# Altium PCB 如意硬件GPRS模块0831.PcbDoc
Units mm, origin at the board's own origin, x right, y up, seen from the top; angles counter-clockwise.
Board outline 55 x 49 mm, 2 copper layers (Top Layer, Bottom Layer); 54 components, 42 nets, 200 pads, 36 vias.
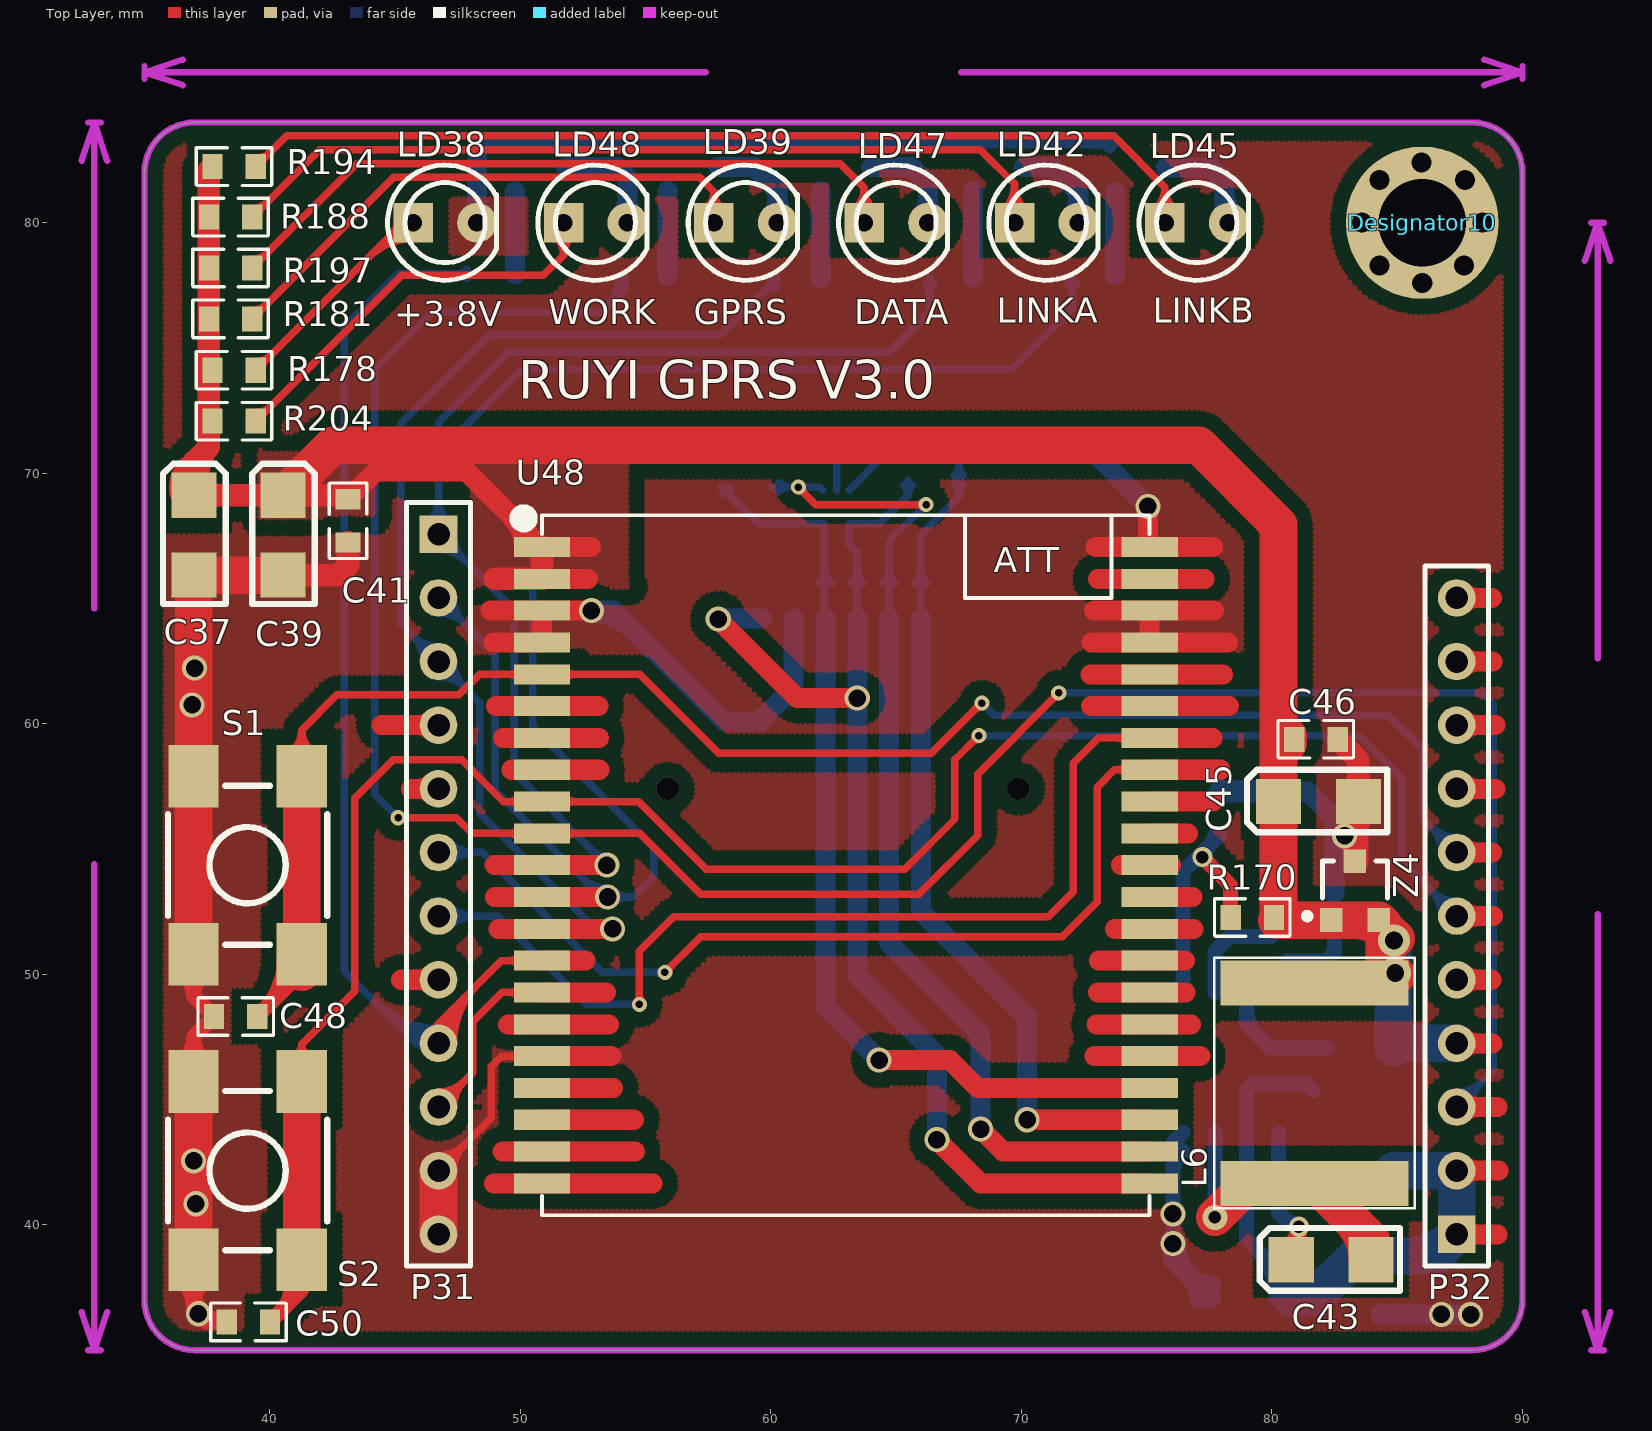
[diagram p0: Top Layer view]
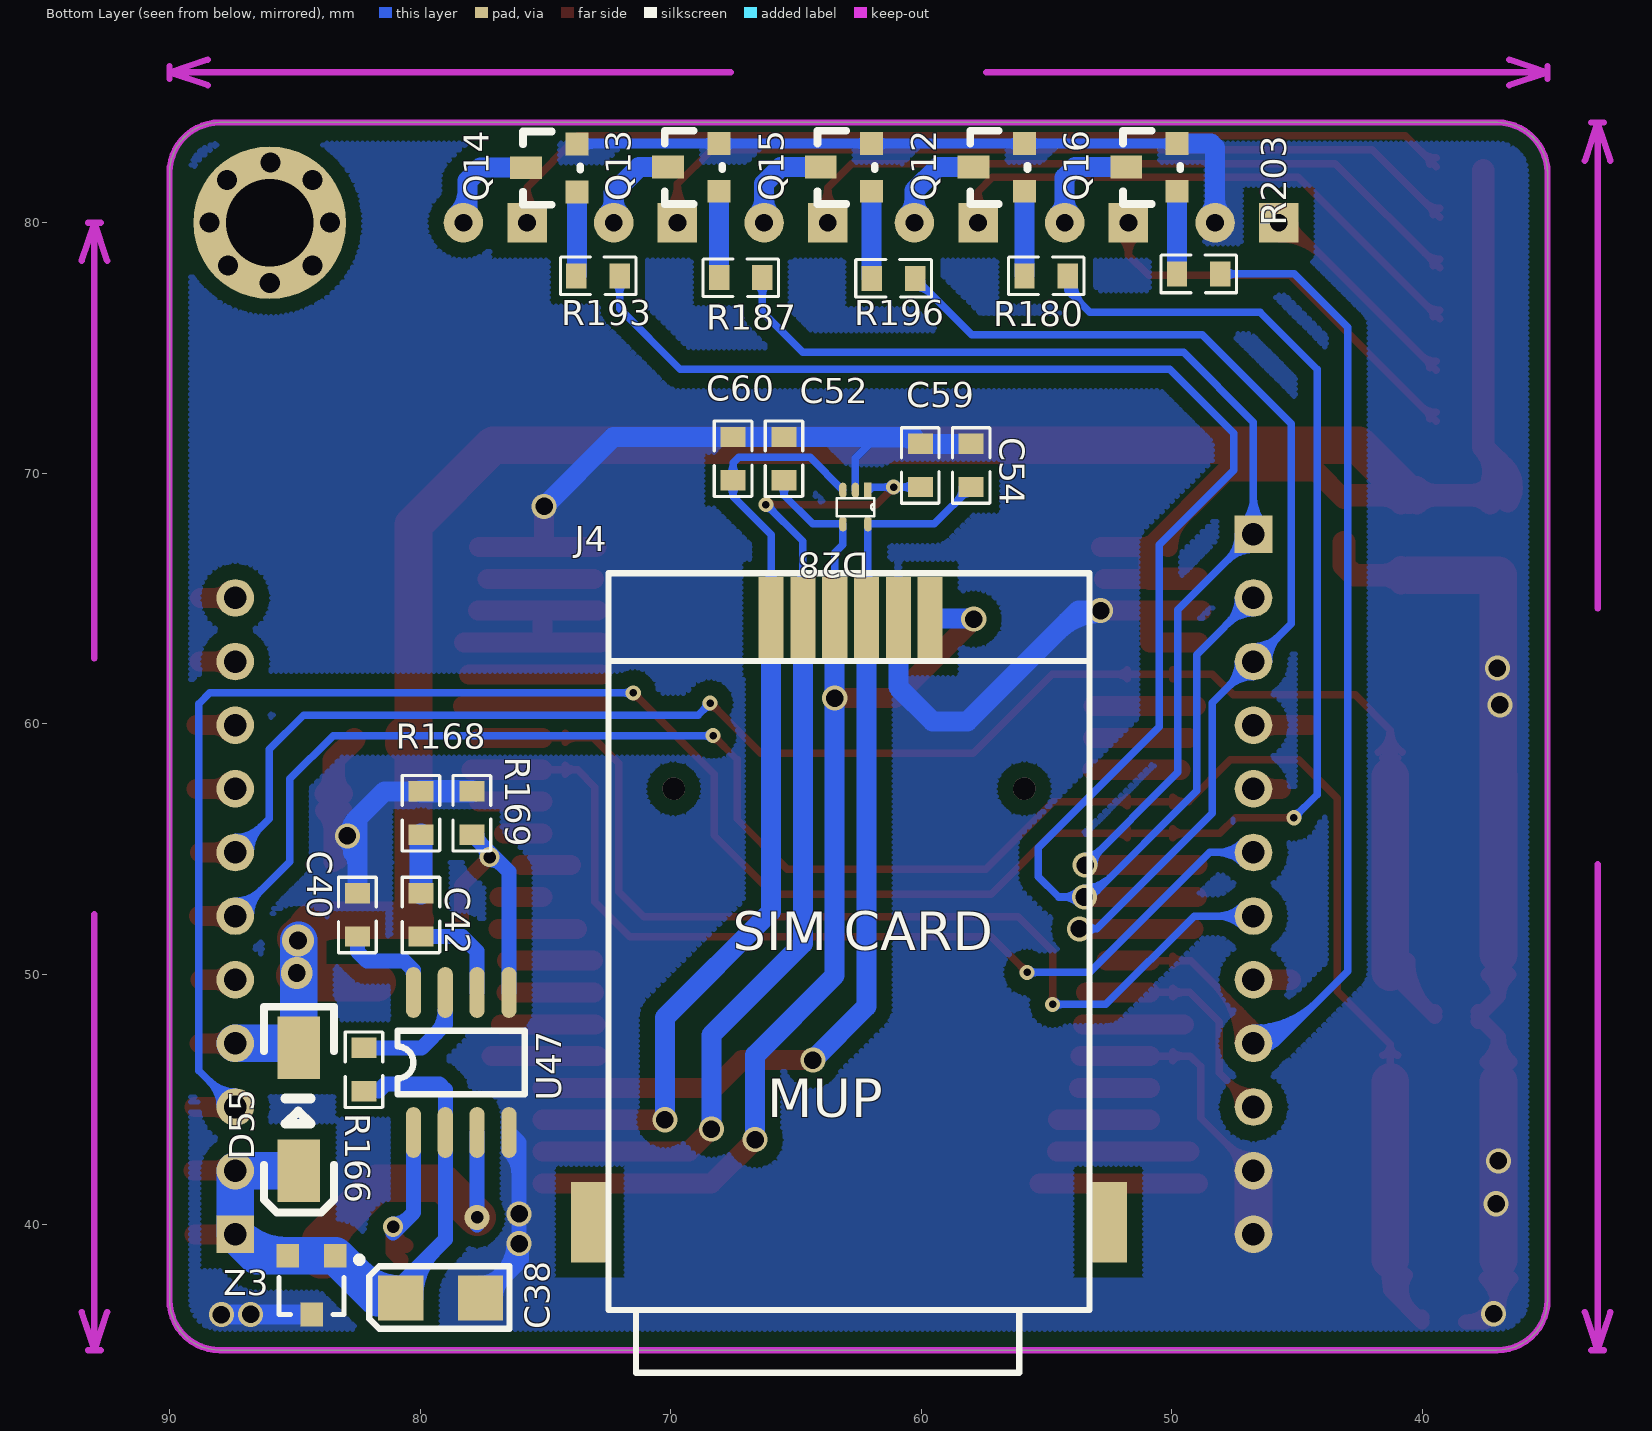
[diagram p1: Bottom Layer view, seen from below]

## Layer stack, top to bottom
Top Layer: signal copper 0.0356
Dielectric: dielectric 0.32, FR-4, Dk 4.8
Bottom Layer: signal copper 0.0356

## Board outline
37,35 cw(c37,37) 35,37 35,82 cw(c37,82) 37,84 88,84 cw(c88,82) 90,82 90,37 cw(c88,37) 88,35

## Design rules (kind name [scope] priority, off if disabled: settings)
Clearance Clearance_1 [InPolygon] p1: gap=0.6
Clearance [All] p2: gap=0.254
ComponentClearance [All] p1: gap=0 collisioncheckmode=3 verticalgap=0 showdistances=FALSE
FabricationTestpoint [(IsPad And (OnTopLayer Or OnBottomLayer))] p1: side=3 testpointundercomponent=TRUE minsize=1.016 maxsize=2.54 preferedsize=1.524 minholesize=0 maxholesize=1.016 preferedholesize=0.813 testpointgrid=0.025 allowsidetop=TRUE allowsidebottom=TRUE usegrid=TRUE gridtolerance=0
HoleToHoleClearance [All] p1: gap=0.2 allowstackedmicrovias=TRUE
MinimumSolderMaskSliver [All] p1: minsoldermaskwidth=0.2
PolygonConnect PolygonConnect_1 [IsVia Or IsSMTPin Or IsThruPin vs IsPoly] p1: connectstyle=Direct reliefconductorwidth=0.254 reliefentries=4 polygonreliefangle="90 Angle"
PolygonConnect [All] p2: connectstyle=Relief reliefconductorwidth=0.254 reliefentries=4 polygonreliefangle="90 Angle"
RoutingVias [All] p1: holewidth=0.711 width=1.27 viastyle="Through Hole" minholewidth=0.3 minwidth=0.6 maxholewidth=0.711 maxwidth=1.27
SilkToSilkClearance [All] p1: silktosilkclearance=0
SilkscreenOverComponentPads [All] p1: minsilkscreentomaskgap=0
SolderMaskExpansion [All] p1: expansion=0.102
Width [All] p1: maxlimit=1.5 minlimit=0.3 preferedwidth=0.8
22 further rules are at their usual default settings.

## Components (designator, comment, footprint, x,y, rotation, side; value= is the part's Value field where it differs from the comment)
C37 "200uf/16V" 1206D-S 36.973,69.121 r0 top
C38 "Cap Pol1" 1206D-S 80.772,37.084 r90 bottom
C39 "47uf/6.3V" 1206D-S 40.529,69.121 r0 top
C40 "0.1uf/50v" 0603C-1 82.56,52.403 r90 bottom
C41 "0.1uf" 0603C-1 43.18,68.072 r270 top
C42 "3.3nf/50v" 0603C-1 80.02,52.403 r90 bottom
C43 "10nf/50v" 1206D-S 80.772,38.608 r90 top
C45 "Cap Pol1" 1206D-S 80.264,56.896 r90 top
C46 "0.1uf/50v" 0603C-1 81.788,59.436 r0 top
C48 "0.1uf" 0603C-1 38.608,48.26 r180 top
C50 "0.1uf" 0603C-1 39.116,36.068 r180 top
C52 "0.1uf" 0603C-1 65.532,70.612 r90 bottom
C54 "47pf" 0603C-1 58.059,70.341 r90 bottom
C59 "47pf" 0603C-1 60.091,70.341 r90 bottom
C60 "47pf" 0603C-1 67.564,70.612 r90 bottom
D28 "ESDA6V8AV5" SOT-553 62.123,69.325 r270 bottom
D55 "IN4007" DIODETP-5 84.836,42.164 r270 bottom
Designator10 "Comment" Hole-3MM 86,80 r0 top
J4 "SIMC749" SIMPUSH 55.88,57.404 r180 bottom
L6 "10uH" NR8030 81.705,41.656 r90 top
LD38 "LED" LED_Z1 47,80 r180 top
LD39 "LED" LED_Z1 59,80 r180 top
LD42 "LED" LED_Z1 71,80 r180 top
LD45 "LED" LED_Z1 77,80 r180 top
LD47 "LED" LED_Z1 65,80 r180 top
LD48 "LED" LED_Z1 53,80 r180 top
P31 "Header 12" HDR1X12 46.736,67.564 r270 top
P32 "Header 11" HDR1X11 87.376,39.624 r90 top
Q12 "9013" SOT23-BCE 55.88,81.255 r90 bottom
Q13 "9013" SOT23-BCE 68.072,81.255 r90 bottom
Q14 "9013" SOT23-BCE 73.735,81.23 r90 bottom
Q15 "9013" SOT23-BCE 61.976,81.255 r90 bottom
Q16 "9013" SOT23-BCE 49.784,81.255 r90 bottom
R166 "100K" 0603R-1 82.296,46.228 r90 bottom
R168 "2.2K" 0603R-1 80.02,56.467 r90 bottom
R169 "10K" 0603R-1 77.988,56.467 r90 bottom
R170 "31.2K" 0603R-1 79.248,52.324 r0 top
R178 "1K" 0603R-1 38.608,74.168 r0 top
R180 "1K" 0603R-1 55.039,77.824 r0 bottom
R181 "1K" 0603R-1 38.465,76.218 r0 top
R187 "1K" 0603R-1 67.231,77.749 r0 bottom
R188 "1K" 0603R-1 38.465,80.282 r0 top
R193 "1K" 0603R-1 72.927,77.824 r0 bottom
R194 "1K" 0603R-1 38.608,82.296 r0 top
R196 "1K" 0603R-1 61.135,77.724 r0 bottom
R197 "1K" 0603R-1 38.465,78.25 r0 top
R203 "1K" 0603R-1 48.951,77.9 r0 bottom
R204 "1K" 0603R-1 38.608,72.136 r0 top
S1 "SW-PB" SW_PB4_A1 39.116,54.356 r90 top
S2 "SW-PB" SW_PB4_A1 39.116,42.164 r90 top
U47 "MP1482" SO-8 80.264,43.688 r90 bottom
U48 "USR-GM3" USR-GM3 62.992,54.356 r0 top
Z3 "NUP2105L" SOT-23 84.328,37.592 r0 bottom
Z4 "NUP2105L" SOT-23 83.312,53.34 r0 top

## Footprints (in the part's own frame and the unit in brackets; to place one, negate y for a bottom-side part, rotate by r counter-clockwise, add the part's x,y. Pads: shape width x height; smd on the part's side, far side on the other; paste and mask are expansions set on the pad)
0603C-1 [mm]
  rect 0.813x1 smd: 1(-0.892,-0.057) 2(0.835,-0.057)
  silkscreen extent -1.54,-0.81 1.47,0.69
0603R-1 [mm]
  rect 0.813x1 smd: 1(-0.892,-0.057) 2(0.835,-0.057)
  silkscreen extent -1.54,-0.81 1.47,0.69
1206D-S [mm]
  rect 1.8x1.8 smd: 1(0,0) 2(0,-3.186)
  silkscreen extent -1.23,-4.34 1.27,1.26
DIODETP-5 [mm]
  rect 2.5x1.702 smd: 1(0,0) 2(-4.9,0)
  silkscreen extent -6.54,-1.39 1.67,1.4
HDR1X11 [mm] "Connector; Header; 11 Position"
  rect 1.5x1.5 hole 0.9: 1(0,0)
  round 1.5 hole 0.9: 2(2.54,0) 3(5.08,0) 4(7.62,0) 5(10.16,0) 6(12.7,0) 7(15.24,0) 8(17.78,0) 9(20.32,0) 10(22.86,0) 11(25.4,0)
  silkscreen extent -1.27,-1.27 26.67,1.27
HDR1X12 [mm] "Connector; Header; 12 Position"
  rect 1.5x1.5 hole 0.9: 1(0,0)
  round 1.5 hole 0.9: 2(2.54,0) 3(5.08,0) 4(7.62,0) 5(10.16,0) 6(12.7,0) 7(15.24,0) 8(17.78,0) 9(20.32,0) 10(22.86,0) 11(25.4,0) 12(27.94,0)
  silkscreen extent -1.27,-1.27 29.21,1.27
Hole-3MM [mm]
  round 6.1 hole 3.5: 0(0,0)
  round 1 hole 0.8: 2(-2.4,0) 3(-0.025,2.4) 4(2.4,0) 5(0,-2.4) 6(-1.7,1.7) 7(1.7,1.7) 8(1.675,-1.7) 9(-1.7,-1.7)
LED_Z1 [mil] "直径3MM二极管"
  rect 62x62 hole 28: 1(50,0)
  round 62 hole 28: 2(-50,0)
  silkscreen extent -81,-91 90,91
NR8030 [mm]
  rect 1.8x7.5 smd: 1(0,0) 2(8,0)
  silkscreen extent -1,-4 9,4
SIMPUSH [mm]
  rect 1x3.3 smd: 1(-3.76,6.8) 2(-5.03,6.8) 3(-6.3,6.8) 4(-7.57,6.8) 5(-8.84,6.8) 6(-10.11,6.8)
  rect 1.5x3.2 smd: 7(3.35,-17.3) 8(-17.35,-17.3)
  silkscreen extent -16.6,-23.3 2.6,8.6
SO-8 [mil]
  oval 80x24 smd: 1(0,0) 2(0,-50) 3(0,-100) 4(0,-150) 5(220,-150) 6(220,-100) 7(220,-50) 8(220,0)
  silkscreen extent 60,-175 160,25
SOT23-BCE [mil]
  rect 36x36 smd: B(0,0) E(75,0)
  rect 36x50 smd: C(38,80)
  silkscreen extent -20,-5 95,85
SOT-23 [mm]
  rect 0.9x0.95 smd: 1(-0.95,-1.175) 2(0.95,-1.175) 3(0,1.175)
  silkscreen extent -2.03,-1.14 1.3,1.18
SOT-553 [mm]
  rect 0.6x0.3 smd: 1(0,0)
  oval 0.6x0.3 smd: 2(0,-0.5) 3(0,-1) 4(1.35,-1) 5(1.35,0)
  silkscreen extent 0.32,-1.25 1.03,0.25
SW_PB4_A1 [mm]
  rect 2.5x2 smd: 1(-3.556,2.159) 2(-3.556,-2.159) 3(3.556,-2.159) 4(3.556,2.159)
  silkscreen extent -3.17,-3.17 3.17,3.17, body extent -3.18,-3.18 3.18,3.18, height 6
USR-GM3 [mm]
  rect 2.25x0.8 smd: 1(-12.125,12.7) 2(-12.125,11.43) 3(-12.125,10.16) 4(-12.125,8.89) 5(-12.125,7.62) 6(-12.125,6.35) 7(-12.125,5.08) 8(-12.125,3.81) 9(-12.125,2.54) 10(-12.125,1.27) 11(-12.125,0) 12(-12.125,-1.27) 13(-12.125,-2.54) 14(-12.125,-3.81) 15(-12.125,-5.08) 16(-12.125,-6.35) 17(-12.125,-7.62) 18(-12.125,-8.89) 19(-12.125,-10.16) 20(-12.125,-11.43) 21(-12.125,-12.7) 22(12.125,-12.7) 23(12.125,-11.43) 24(12.125,-10.16) 25(12.125,-8.89) 26(12.125,-7.62) 27(12.125,-6.35) 28(12.125,-5.08) 29(12.125,-3.81) 30(12.125,-2.54) 31(12.125,-1.27) 32(12.125,0) 33(12.125,1.27) 34(12.125,2.54) 35(12.125,3.81) 36(12.125,5.08) 37(12.125,6.35) 38(12.125,7.62) 39(12.125,8.89) 40(12.125,10.16) 41(12.125,11.43) 42(12.125,12.7)
  silkscreen extent -13.14,-13.97 12.12,14.13

## Part data
C37 C39: library part ELECTRO1, "Electrolytic Capacitor"
C38 C45: "Polarized Capacitor (Radial)"
C40 C41 C42 C43 C46 C52 C54 C59 C60: library part C
C48 C50: library part CAP, "Capacitor"
D55: library part DIODE, "Diode"
L6: library part INDUCTOR
P31: "Header, 12-Pin"
P32: "Header, 11-Pin"
Q12 Q13 Q14 Q15 Q16: library part NPN
R166 R168 R169 R170 R178 R180 R181 R187 R188 R193 R194 R196 R197 R203 R204: library part RES-2
S1 S2: "Switch"
Z3 Z4: library part PESD1CAN, "过压保护"

## Via types
v1: diameter 1, hole 0.7, Top Layer to Bottom Layer, 21 vias
v2: diameter 0.6, hole 0.3, Top Layer to Bottom Layer, 8 vias
v3: diameter 0.8, hole 0.5, Top Layer to Bottom Layer, 2 vias
v4: diameter 1.27, hole 0.711, Top Layer to Bottom Layer, 2 vias
v5: diameter 0.9, hole 0.9, Top Layer to Bottom Layer, 2 vias
v6: diameter 1, hole 0.5, Top Layer to Bottom Layer, 1 vias

## Nets (pads, with @x,y where several pads share a name; then routed paths per layer and width w, separated by ;. In a path a pad name is that pad's centre, name@x,y a point inside that pad or via, vN(x,y) a via of type N, cw(c..) or ccw(c..) an arc to the next point about the centre after c; other vN are vias at no path point)
+5V: C38.1 D55.1 P32.1 P32.2 R166.1 U47.2 Z3.1 Z3.2 | length 38.2
  Top Layer w0.8: P32.1 89.001,39.624 ; P32.2 89.039,42.164 ; P32.1@87.623,39.377 cw(c88.221,38.779) 88.221,39.624 cw(c88.221,40.469) P32.1@87.623,39.871 ; P32.2@87.623,41.917 cw(c88.221,41.319) 88.221,42.164 cw(c88.221,43.009) P32.2@87.623,42.411
  Bottom Layer w0.6: 79.354,39.059 cw(c77.379,37.084) C38.1@80.172,37.084 ; 80.378,38.035 cw(c79.427,37.084) C38.1 80.772,37.641 78.994,39.419 U47.2 78.994,45.394 79.225,45.625 81.375,45.625 81.664,45.336
  Bottom Layer w1.5: C38.1 81.695,37.084 Z3.1 86.519,38.767 P32.1 ; C38.1@80.772,37.234 ccw(c80.772,39.824) 82.604,37.993 ; D55.1 P32.2 P32.1 ; Z3.2@85.307,38.767 ccw(c85.307,41.693) P32.1
DATA: P31.3 R196.1 U48.13 | length 52.5
  Top Layer w0.8: 49.134,51.816 U48.13 v1(53.684,51.816)
  Bottom Layer w0.3: P31.3@46.136,62.484 ccw(c44.687,62.484) 45.712,63.508 ccw(c46.736,64.533) P31.3@46.736,63.084 ; P31.3@46.736,61.884 cw(c46.736,60.435) 47.76,61.46 cw(c48.785,62.484) P31.3@47.336,62.484 ; v1@53.404,51.606 ccw(c52.984,51.291) 52.984,51.816 ; v1@53.404,52.026 cw(c52.984,52.341) 52.984,51.816 ; v1(53.684,51.816) 52.984,51.816 ; 59.645,77.184 cw(c60.243,76.586) R196.1@60.243,77.431 ; R196.1@59.871,77.409 ccw(c59.593,77.687) R196.1@59.986,77.687 ; R196.1 57.987,75.525 48.775,75.525 45.225,71.975 45.225,63.995 P31.3 48.375,60.845 48.375,56.425 52.984,51.816
GND: C37.2 C38.2 C39.2 C40.2 C41.2 C45.2 C46.2 C48.2 C50.2 C52.2 C54.2 C59.2 C60.2 D28.2 J4.2 LD38.2 P31.11 P31.12 Q12.E Q13.E Q14.E Q15.E Q16.E R168.2 R169.2 S1.1 S1.4 S2.1 S2.4 U47.4 U48.3 U48.4 U48.17 U48.39 U48.40 U48.42 Z3.3 Z4.3 | length 208.8
  Top Layer w0.3: P31.11 48.85,44.278 48.85,46.325 49.261,46.736 U48.17 ; P31.11@46.736,42.764 ccw(c46.736,44.213) 47.76,43.188 ccw(c48.785,42.164) P31.11@47.336,42.164 ; U48.17@49.965,46.559 ccw(c49.538,46.132) 49.538,46.736 ccw(c49.538,47.34) U48.17@49.965,46.913
  Top Layer w0.6: S2.1@36.462,37.863 cw(c35.267,36.668) 36.957,36.668 cw(c38.647,36.668) S2.1@37.452,37.863 ; S2.4@36.499,46.499 ccw(c35.633,47.501) 36.957,47.501 ; S1.1@36.532,49.994 cw(c35.873,49.133) 36.957,49.133 ; S2.1@36.957,37.394 ccw(c38.088,37.394) v1@37.288,36.595 ; S2.1 36.957,36.643 37.475,36.125 C50.2 ; S2.4 36.957,47.501 ; S1.1 36.957,49.133 ; v1@37.3,36.582 ccw(c38.281,37.407) C50.2 ; S1.1@37.382,49.994 ccw(c38.041,49.133) 36.957,49.133 ; S2.4@37.415,46.499 cw(c38.281,47.501) 36.957,47.501 ; C48.2@37.432,47.976 cw(c37.773,47.634) C48.2@37.773,48.117 ; C48.2@37.432,48.658 ccw(c37.773,49) C48.2@37.773,48.517 ; 36.957,47.501 C48.2 36.957,49.133
  Top Layer w0.8: 48.816,64.516 U48.3 ; 48.929,63.246 U48.4 U48.3 ; U48.17 53.636,46.736 ; v1(52.834,64.516) U48.3 ; 72.804,63.246 U48.39 ; 72.909,64.516 U48.40 ; 72.956,67.056 U48.42 77.656,67.056 ; U48.42@75.05,67.123 v1(75.05,68.675) ; 77.691,64.516 U48.40 ; 78.254,63.246 U48.39 ; v1@82.837,55.602 ccw(c81.779,56.896) C45.2 Z4.3@83.45,54.653 ; v1@82.857,55.435 cw(c82.407,54.494) Z4.3@83.45,54.494 ; C45.2@83.096,56.542 cw(c82.243,55.689) 83.45,55.689 cw(c84.657,55.689) C45.2@83.803,56.542 ; C45.2@83.202,56.157 cw(c83.014,55.763) 83.45,55.763 ; Z4.3@83.277,54.575 ccw(c82.859,54.993) 83.45,54.993 ; Z4.3@83.343,54.983 ccw(c83.159,55.208) 83.45,55.208 ; U48.39 U48.40
  Top Layer w0.9: C39.2 42.735,65.935 43.123,66.323 C41.2 ; C39.2@40.847,65.617 cw(c41.615,64.849) 41.615,65.935 cw(c41.615,67.022) C39.2@40.847,66.253 ; C46.2 83.45,58.552 C45.2 ; C45.2@83.132,57.214 ccw(c82.363,57.982) 83.45,57.982 ccw(c84.536,57.982) C45.2@83.768,57.214
  Top Layer w1.5: S2.1 S2.4 ; S1.1 S1.4 ; S1.4@36.973,57.928 C37.2 C39.2 ; P31.12 P31.11
  Bottom Layer w0.3: C59.2 62.049,71.176 62.623,70.602 D28.2 ; C59.2@60.309,70.995 cw(c60.747,70.557) 60.747,71.176 cw(c60.747,71.795) C59.2@60.309,71.357
  Bottom Layer w0.4: Q16.E Q12.E Q15.E Q13.E Q14.E@73.71,83.16 ; Q16.E@49.966,82.978 cw(c50.405,82.539) 50.405,83.16 cw(c50.405,83.781) Q16.E@49.966,83.342 ; Q12.E@55.698,82.978 ccw(c55.259,82.539) 55.259,83.16 ccw(c55.259,83.781) Q12.E@55.698,83.342 ; Q12.E@56.062,82.978 cw(c56.501,82.539) 56.501,83.16 cw(c56.501,83.781) Q12.E@56.062,83.342 ; Q15.E@61.794,82.978 ccw(c61.355,82.539) 61.355,83.16 ccw(c61.355,83.781) Q15.E@61.794,83.342 ; Q15.E@62.158,82.978 cw(c62.597,82.539) 62.597,83.16 cw(c62.597,83.781) Q15.E@62.158,83.342 ; Q13.E@67.89,82.978 ccw(c67.451,82.539) 67.451,83.16 ccw(c67.451,83.781) Q13.E@67.89,83.342 ; Q13.E@68.254,82.978 cw(c68.693,82.539) 68.693,83.16 cw(c68.693,83.781) Q13.E@68.254,83.342 ; 73.054,83.16 cw(c73.054,82.454) Q14.E@73.553,82.953 ; 73.174,83.16 ccw(c73.174,83.696) Q14.E@73.553,83.317
  Bottom Layer w0.6: v1(76.05,39.25) 76.05,43.284 U47.4 ; 76.05,41.99 cw(c77.441,41.99) U47.4@76.457,42.973
  Bottom Layer w0.8: LD38.2@47.996,80.274 ccw(c47.335,80.935) 48.27,80.935 ccw(c49.205,80.935) LD38.2@48.544,80.274 ; LD38.2 48.27,82.995 48.435,83.16 Q16.E ; v1@52.75,64.525 53.725,64.525 58.15,60.1 59.55,60.1 60.91,61.46 J4.2 ; v1@52.834,64.416 cw(c52.834,62.002) 54.541,63.709 ; v1@52.861,64.42 cw(c53.223,63.123) 54.175,64.075 ; C54.2 C59.2 ; C59.2@60.132,71.171 cw(c60.797,70.506) 60.797,71.447 ; C59.2@60.305,71.447 C52.2 C60.2 72.278,71.447 v1(75.05,68.675) ; v1(76.05,39.25) 76.05,38.62 C38.2 ; v1@76.15,39.25 ccw(c77.912,39.25) 76.666,38.004 ; C38.2@77.086,37.084 ccw(c75.879,37.084) 76.733,37.938 ccw(c77.586,38.791) C38.2@77.586,37.584 ; R168.2 81.423,57.302 82.503,56.222 ; C40.2 82.503,56.222 ; 82.503,54.325 cw(c84.1,54.325) v1@82.971,55.454 ; 82.503,55.1 ccw(c82.754,55.1) 82.672,54.863 ; v1@82.933,55.62 cw(c83.14,56.222) 82.503,56.222 ; Z3.3 v1(87.933,36.417) ; 82.517,56.208 cw(c81.834,55.525) 82.8,55.525 ccw(c81.834,55.525) 82.517,56.208
  Bottom Layer w0.9: R169.2 R168.2
  other v1: 86.766,36.425 37.147,36.453 76.05,40.437 37.05,40.843 36.957,42.55 82.9,55.525 36.9,60.757 37,62.225
GPRS: P32.3 R180.1 U48.10 | length 108.1
  Top Layer w0.3: v2@45.1,56.25 v2(45.125,56.25) 47.45,56.25 48.074,55.626 U48.10 54.766,55.626 57.196,53.196 65.904,53.196 68.25,55.542 68.25,57.992 v2(71.491,61.234) ; v2@45.231,56.144 cw(c45.487,55.888) 45.487,56.25 cw(c45.487,56.612) v2@45.231,56.356 ; U48.10@49.965,55.449 ccw(c49.538,55.022) 49.538,55.626 ccw(c49.538,56.23) U48.10@49.965,55.803 ; U48.10@51.769,55.449 cw(c52.196,55.022) 52.196,55.626 cw(c52.196,56.23) U48.10@51.769,55.803 ; v2@71.341,61.234 cw(c70.979,61.234) 71.235,60.977 cw(c71.491,60.721) v2@71.491,61.084
  Top Layer w0.8: P32.3 88.996,44.704 ; P32.3@87.623,44.457 cw(c88.221,43.859) 88.221,44.704 cw(c88.221,45.549) P32.3@87.623,44.951
  Bottom Layer w0.3: v2@44.975,56.25 ccw(c44.613,56.25) 44.869,56.506 ccw(c45.125,56.762) v2@45.125,56.4 ; v2(45.125,56.25) 44.2,57.175 44.2,74.15 46.475,76.425 53.275,76.425 54.147,77.297 R180.1 ; 53.52,76.67 ccw(c52.598,77.593) R180.1@53.892,77.755 ; 53.954,77.104 ccw(c53.368,77.69) R180.1@54.19,77.793 ; v2(71.491,61.234) 88.391,61.234 88.825,60.8 88.825,46.153 P32.3 ; v2@71.598,61.127 cw(c71.854,60.871) 71.854,61.234 cw(c71.854,61.596) v2@71.598,61.34 ; P32.3@87.376,45.304 ccw(c87.376,46.753) 88.4,45.728 ccw(c89.425,44.704) P32.3@87.976,44.704
GPRS_CTS: U48.37 | length 5.5
  Top Layer w0.8: 72.781,60.706 U48.37 78.294,60.706
GPRS_RTS: U48.38 | length 5.3
  Top Layer w0.8: 72.751,61.976 U48.38 78.051,61.976
GPRS_RXD: P31.7 U48.36 | length 45.4
  Top Layer w0.3: v2@54.644,48.906 ccw(c54.388,49.162) 54.75,49.162 ccw(c55.112,49.162) v2@54.856,48.906 ; v2(54.75,48.8) 54.75,50.925 56.125,52.3 71.075,52.3 72.075,53.3 72.075,58.425 73.086,59.436 U48.36 ; U48.36@74.215,59.259 ccw(c73.788,58.832) 73.788,59.436 ccw(c73.788,60.04) U48.36@74.215,59.613
  Top Layer w0.8: U48.36 77.636,59.436
  Bottom Layer w0.3: P31.7 49.101,52.324 52.625,48.8 v2(54.75,48.8) ; P31.7@47.16,51.9 cw(c48.185,50.875) 48.185,52.324 cw(c48.185,53.773) P31.7@47.16,52.748 ; v2@54.644,48.694 ccw(c54.388,48.438) 54.388,48.8 ccw(c54.388,49.162) v2@54.644,48.906
GPRS_TXD: P31.6 U48.35 | length 43.6
  Top Layer w0.3: v2(55.775,50.075) 57.2,51.5 71.625,51.5 73.025,52.9 73.025,57.475 73.716,58.166 U48.35 ; v2@55.775,50.225 ccw(c55.775,50.587) 56.031,50.331 ccw(c56.287,50.075) v2@55.925,50.075 ; U48.35@74.215,57.989 ccw(c73.788,57.562) 73.788,58.166 ccw(c73.788,58.77) U48.35@74.215,58.343
  Top Layer w0.8: U48.35 77.941,58.166
  Bottom Layer w0.3: P31.6 48.486,54.864 53.275,50.075 v2(55.775,50.075) ; P31.6@47.16,54.44 cw(c48.185,53.415) 48.185,54.864 cw(c48.185,56.313) P31.6@47.16,55.288 ; v2@55.669,49.969 ccw(c55.413,49.713) 55.413,50.075 ccw(c55.413,50.437) v2@55.669,50.181
LINKA: P31.1 R187.1 U48.11 | length 54.6
  Top Layer w0.8: 48.981,54.356 U48.11 v1(53.456,54.356)
  Bottom Layer w0.3: P31.1@46.312,67.988 ccw(c45.287,69.013) 46.736,69.013 ccw(c48.185,69.013) P31.1@47.16,67.988 ; P31.1@46.736,66.964 cw(c46.736,65.515) 47.76,66.54 cw(c48.785,67.564) P31.1@47.336,67.564 ; v1@53.106,54.356 ccw(c52.261,54.356) 52.859,54.953 ccw(c53.456,55.551) v1@53.456,54.706 ; v1(53.456,54.356) 49.75,58.062 49.75,64.55 P31.1 46.736,72.036 49.525,74.825 64.725,74.825 66.339,76.439 R187.1 ; R187.1@66.158,77.531 cw(c65.72,77.093) 66.339,77.093 cw(c66.958,77.093) R187.1@66.52,77.531
LINKB: P31.2 R193.1 U48.12 | length 76.6
  Top Layer w0.8: 48.986,53.086 U48.12 v1(53.486,53.086)
  Bottom Layer w0.3: P31.2@46.736,64.424 cw(c46.736,62.975) 47.76,64 cw(c48.785,65.024) P31.2@47.336,65.024 ; P31.2 49,62.76 49,57.325 53.239,53.086 v1(53.486,53.086) 54.511,53.086 55.325,53.9 55.325,55.05 50.5,59.875 50.5,67.15 47.525,70.125 47.525,71.6 50.075,74.15 69.625,74.15 72.035,76.56 R193.1 ; 52.467,53.858 ccw(c53.486,54.877) v1@53.486,53.436 ; 52.979,53.346 ccw(c53.486,53.853) v1@53.486,53.136 ; v1@53.733,52.839 cw(c54.331,52.241) 54.331,53.086 cw(c54.331,53.931) v1@53.733,53.333 ; R193.1@71.853,77.606 cw(c71.416,77.168) 72.035,77.168 cw(c72.654,77.168) R193.1@72.216,77.606
NetC40_1: C40.1 U47.8 | length 4.4
  Bottom Layer w0.6: U47.8 80.264,50.164 80.625,50.525 82.125,50.525 82.503,50.903 C40.1 ; U47.8@80.269,49.987 cw(c80.707,49.987) 80.397,50.297
NetC42_1: C42.1 U47.6 | length 4.1
  Bottom Layer w0.6: U47.6 U47.6 77.725,50.922 78.314,51.511 C42.1
NetC42_2: C42.2 R168.1 | length 2.3
  Bottom Layer w0.9: C42.2 R168.1
NetC43_1: C43.1 U47.1 | length 7.4
  Top Layer w0.6: C43.1@80.556,39.168 ccw(c80.263,39.925) 81.075,39.925 81.075,38.911 C43.1
  Bottom Layer w0.6: U47.1 80.264,40.486 v3@81.075,39.675 ; 80.478,40.272 ccw(c81.075,40.87) v3@81.075,40.025
  other v3: 81.075,39.925
NetC43_2: C43.2 L6.1 U47.3 | length 14
  Top Layer w1.5: v6(77.725,40.3) 79.081,41.656 L6.1 83.958,39.403 C43.2 ; 83.139,40.222 cw(c81.526,38.608) C43.2@83.808,38.608
  Bottom Layer w0.6: v6@77.724,40.001 U47.3
NetLD38_1: LD38.1 R178.2 | length 14.3
  Top Layer w0.3: R178.2 45.332,80 LD38.1 ; R178.2@39.443,74.461 ccw(c39.443,75.306) 40.04,74.708 ; R178.2@39.699,74.205 cw(c40.092,74.205) R178.2@39.815,74.483 ; 43.962,78.63 cw(c45.73,76.863) LD38.1@45.73,79.363 ; 44.475,79.143 cw(c45.73,77.887) LD38.1@45.73,79.663 ; 44.923,79.591 ccw(c44.515,80) LD38.1@45.093,80 ; LD38.1@44.987,79.655 cw(c45.73,78.911) LD38.1@45.73,79.963
NetLD39_1: LD39.1 R181.2 | length 24.9
  Top Layer w0.3: R181.2 44.946,81.807 57.168,81.807 57.73,81.245 ; R181.2@39.3,76.511 ccw(c39.3,77.356) 39.897,76.758 ; R181.2@39.556,76.255 cw(c39.949,76.255) R181.2@39.672,76.533 ; LD39.1@57.357,80.517 ccw(c56.833,81.245) 57.73,81.245 ; LD39.1 57.73,81.245 ; LD39.1@58.103,80.517 cw(c58.627,81.245) 57.73,81.245
NetLD39_2: LD39.2 Q12.C | length 5.5
  Bottom Layer w0.8: Q12.C 59.33,82.22 60.27,81.28 LD39.2 ; LD39.2@59.996,80.274 ccw(c59.335,80.935) 60.27,80.935 ccw(c61.205,80.935) LD39.2@60.544,80.274
NetLD42_1: LD42.1 R188.2 | length 38.3
  Top Layer w0.3: R188.2 41.99,82.915 68.36,82.915 69.73,81.545 LD42.1 ; R188.2@39.3,80.575 ccw(c39.3,81.42) 39.897,80.822 ; R188.2@39.556,80.319 cw(c39.949,80.319) R188.2@39.672,80.597 ; LD42.1@69.279,80.451 ccw(c68.191,81.539) 69.73,81.539 ccw(c71.269,81.539) LD42.1@70.181,80.451 ; LD42.1@69.491,80.239 ccw(c68.915,80.815) 69.73,80.815 ccw(c70.545,80.815) LD42.1@69.969,80.239
NetLD42_2: LD42.2 Q13.C | length 5.3
  Bottom Layer w0.8: Q13.C 71.255,82.22 72.27,81.205 LD42.2 ; LD42.2@71.996,80.274 ccw(c71.335,80.935) 72.27,80.935 ccw(c73.205,80.935) LD42.2@72.544,80.274
NetLD45_1: LD45.1 R194.2 | length 42.2
  Top Layer w0.3: R194.2 40.673,83.469 73.681,83.469 75.73,81.42 ; R194.2@39.443,82.589 ccw(c39.443,83.434) 40.04,82.836 ; R194.2@39.699,82.333 cw(c40.092,82.333) R194.2@39.815,82.611 ; LD45.1@75.306,80.476 ccw(c74.467,81.42) 75.73,81.42 ; LD45.1 75.73,81.42 ; LD45.1@76.154,80.476 cw(c76.993,81.42) 75.73,81.42
NetLD45_2: LD45.2 Q14.C | length 5.5
  Bottom Layer w0.8: Q14.C 77.58,82.195 78.1,81.675 78.1,80.17 LD45.2 ; 78.1,81.346 ccw(c79.616,81.346) LD45.2@78.544,80.274
NetLD47_1: LD47.1 R197.2 | length 31
  Top Layer w0.3: R197.2 43.468,82.361 62.764,82.361 63.73,81.395 LD47.1 ; R197.2@39.3,78.543 ccw(c39.3,79.388) 39.897,78.79 ; R197.2@39.556,78.287 cw(c39.949,78.287) R197.2@39.672,78.565 ; LD47.1@63.313,80.482 ccw(c62.522,81.395) 63.73,81.395 ccw(c64.938,81.395) LD47.1@64.147,80.482
NetLD47_2: LD47.2 Q15.C | length 5.6
  Bottom Layer w0.8: Q15.C 65.605,82.22 66.27,81.555 LD47.2 ; LD47.2@65.996,80.274 ccw(c65.335,80.935) 66.27,80.935 ccw(c67.205,80.935) LD47.2@66.544,80.274
NetLD48_1: LD48.1 R204.2 | length 19.1
  Top Layer w0.3: R204.2 45.264,77.9 50.925,77.9 51.73,78.705 ; R204.2@39.443,72.429 ccw(c39.443,73.274) 40.04,72.676 ; R204.2@39.699,72.173 cw(c40.092,72.173) R204.2@39.815,72.451 ; LD48.1@51.341,79.495 cw(c50.733,78.705) 51.73,78.705 ; LD48.1 51.73,78.705 ; LD48.1@52.119,79.495 ccw(c52.727,78.705) 51.73,78.705
NetLD48_2: LD48.2 Q16.C | length 5.9
  Bottom Layer w0.8: Q16.C 53.855,82.22 54.27,81.805 LD48.2 ; LD48.2@53.996,80.274 ccw(c53.335,80.935) 54.27,80.935 ccw(c55.205,80.935) LD48.2@54.544,80.274
NetQ12_B: Q12.B R180.2 | length 3.4
  Bottom Layer w0.8: R180.2@55.88,77.887 Q12.B
NetQ13_B: Q13.B R187.2 | length 3.4
  Bottom Layer w0.8: R187.2@68.072,77.812 Q13.B
NetQ14_B: Q14.B R193.2 | length 3.3
  Bottom Layer w0.8: R193.2@73.735,77.908 Q14.B
NetQ15_B: Q15.B R196.2 | length 3.5
  Bottom Layer w0.8: R196.2@61.976,77.787 Q15.B
NetQ16_B: Q16.B R203.2 | length 3.3
  Bottom Layer w0.8: R203.2 Q16.B@49.786,81.253
NetR166_2: R166.2 U47.7 | length 6
  Bottom Layer w0.6: U47.7 78.994,48.006 79.937,47.063 R166.2 ; U47.7@78.999,48.565 ccw(c80.359,48.565) 79.397,47.603
NetR169_1: R169.1 R170.1 U47.5 | length 11.3
  Top Layer w0.6: v3(77.225,54.675) 78.356,53.544 R170.1
  Bottom Layer w0.6: U47.5 76.454,54.098 R169.1 ; 76.723,54.367 cw(c77.225,53.866) v3@77.225,54.575 ; v3@77.325,54.675 cw(c78.034,54.675) R169.1@77.533,55.177 ; R169.1@77.59,55.233 ccw(c77.248,55.575) R169.1@77.731,55.575
RELOAD: C48.1 P32.7 S1.2 S1.3 U48.5 | length 80.5
  Top Layer w0.3: S1.3@40.804,58.869 ccw(c40.217,59.75) 41.275,59.75 ; S1.3@40.97,58.62 ccw(c40.59,59.189) 41.275,59.189 ccw(c41.96,59.189) S1.3@41.58,58.62 ; S1.3 41.275,59.75 ; S1.3@41.746,58.869 cw(c42.333,59.75) 41.275,59.75 ; U48.5@49.965,61.799 ccw(c49.538,61.372) 49.538,61.976 ccw(c49.538,62.58) U48.5@49.965,62.153 ; U48.5@51.769,61.799 cw(c52.196,61.372) 52.196,61.976 cw(c52.196,62.58) U48.5@51.769,62.153 ; 68.126,60.551 cw(c68.425,60.253) v2@68.425,60.675 ; 68.187,60.612 ccw(c67.973,60.825) v2@68.275,60.825 ; v2@68.4,60.825 66.4,58.825 57.925,58.825 54.774,61.976 U48.5 48.376,61.976 47.55,61.15 42.675,61.15 41.275,59.75
  Top Layer w0.6: C48.1 S1.2@41.275,50.092 ; C48.1@39.5,48.517 ccw(c39.5,49) C48.1@39.842,48.658 ; C48.1@39.756,48.573 ccw(c37.779,50.55) S1.2@40.575,50.55 ; S1.2@40.78,49.597 ccw(c39.827,50.55) S1.2@41.175,50.55
  Top Layer w0.8: P32.7 88.789,54.864 ; P32.7@87.623,54.617 cw(c88.221,54.019) 88.221,54.864 cw(c88.221,55.709) P32.7@87.623,55.111
  Top Layer w1.5: S1.2@41.275,50.092 S1.2 S1.3
  Bottom Layer w0.3: v2@68.425,60.675 cw(c68.425,60.313) 68.681,60.569 cw(c68.937,60.825) v2@68.575,60.825 ; v2(68.425,60.825) 68.9,60.35 84.65,60.35 86.025,58.975 86.025,56.215 P32.7 ; P32.7@86.776,54.864 ccw(c85.327,54.864) 86.352,55.888 ccw(c87.376,56.913) P32.7@87.376,55.464
RESET: C50.1 P32.6 S2.2 S2.3 U48.9 | length 89.6
  Top Layer w0.3: S2.3@40.974,46.765 ccw(c40.81,47.2) 41.275,47.2 ; S2.3 41.275,47.2 ; S2.3@41.576,46.765 cw(c41.74,47.2) 41.275,47.2 ; U48.9@49.965,56.719 ccw(c49.538,56.292) 49.538,56.896 ccw(c49.538,57.5) U48.9@49.965,57.073 ; U48.9@51.769,56.719 cw(c52.196,56.292) 52.196,56.896 cw(c52.196,57.5) U48.9@51.769,57.073 ; v2@68.15,59.525 cw(c67.788,59.525) 68.044,59.269 cw(c68.3,59.013) v2@68.3,59.375 ; v2(68.3,59.525) 67.35,58.575 67.35,56.2 65.35,54.2 57.425,54.2 54.729,56.896 U48.9 49.329,56.896 47.667,58.558 44.933,58.558 43.4,57.025 43.4,49.325 41.275,47.2
  Top Layer w0.6: C50.1 41.275,37.392 S2.2 ; C50.1@40.008,36.325 ccw(c40.008,36.808) C50.1@40.35,36.466 ; 40.491,36.608 ccw(c39.677,37.423) S2.2@40.671,38.004 ; 41.041,37.158 ccw(c40.37,37.828) S2.2@41.189,38.307
  Top Layer w0.8: P32.6 88.824,52.324 ; P32.6@87.623,52.077 cw(c88.221,51.479) 88.221,52.324 cw(c88.221,53.169) P32.6@87.623,52.571
  Top Layer w1.5: S2.2 S2.3
  Bottom Layer w0.3: v2(68.3,59.525) 71.625,59.525 83.475,59.525 85.2,57.8 85.2,54.5 P32.6 ; v2@68.406,59.419 cw(c68.662,59.163) 68.662,59.525 cw(c68.662,59.887) v2@68.406,59.631 ; P32.6@86.776,52.324 ccw(c85.327,52.324) 86.352,53.348 ccw(c87.376,54.373) P32.6@87.376,52.924
SHUT: P31.10 U48.15 | length 13
  Top Layer w0.3: P31.10 48.1,46.068 48.1,48.1 49.276,49.276 U48.15 ; P31.10@46.736,45.304 ccw(c46.736,46.753) 47.76,45.728 ccw(c48.785,44.704) P31.10@47.336,44.704 ; U48.15@49.965,49.099 ccw(c49.538,48.672) 49.538,49.276 ccw(c49.538,49.88) U48.15@49.965,49.453
  Top Layer w0.8: U48.15 53.424,49.276
SIM_CLK: C59.1 D28.1 J4.5 U48.23 | length 46.8
  Top Layer w0.3: v2@61.1,69.299 cw(c61.1,68.937) 61.356,69.193 cw(c61.612,69.449) v2@61.25,69.449 ; v2(61.1,69.449) 61.799,68.75 v2(66.2,68.75) ; v2@66.094,68.644 ccw(c65.838,68.388) 65.838,68.75 ccw(c65.838,69.112) v2@66.094,68.856
  Top Layer w0.8: v1(68.375,43.825) 69.274,42.926 U48.23
  Bottom Layer w0.3: C59.1 v2(61.1,69.449) 61.945,69.449 D28.1@62.069,69.325 ; C59.1@60.309,69.267 cw(c60.747,68.83) 60.747,69.449 cw(c60.747,70.068) C59.1@60.309,69.63 ; v2@60.994,69.343 ccw(c60.738,69.087) 60.738,69.449 ccw(c60.738,69.811) v2@60.994,69.555 ; v2@61.206,69.343 cw(c61.462,69.087) 61.462,69.449 cw(c61.462,69.811) v2@61.206,69.555 ; J4.5@64.473,65.601 ccw(c63.875,66.199) 64.72,66.199 ccw(c65.565,66.199) J4.5@64.967,65.601 ; J4.5 64.72,67.295 v2@66.175,68.75 ; 65.901,68.476 cw(c66.2,68.178) v2@66.2,68.6 ; 65.962,68.537 ccw(c65.748,68.75) v2@66.05,68.75
  Bottom Layer w0.8: J4.5 64.72,51.23 68.375,47.575 v1(68.375,43.825)
SIM_DAT: C60.1 D28.3 J4.6 U48.24 | length 41.8
  Top Layer w0.8: v1(70.229,44.196) U48.24
  Bottom Layer w0.3: D28.3 64.435,70.637 67.288,70.637 67.507,70.418 C60.1 67.507,69.057 65.99,67.54 J4.6 ; J4.6@65.743,65.601 ccw(c65.145,66.199) 65.99,66.199 ccw(c66.835,66.199) J4.6@66.237,65.601 ; C60.1@67.326,69.538 cw(c66.888,69.101) 67.507,69.101 cw(c68.126,69.101) C60.1@67.688,69.538 ; C60.1@67.326,69.901 ccw(c66.888,70.339) 67.507,70.339 ccw(c68.126,70.339) C60.1@67.688,69.901
  Bottom Layer w0.8: J4.6 65.99,52.51 70.229,48.271 v1(70.229,44.196)
SIM_RST: C54.1 D28.5 J4.3 U48.25 | length 40.6
  Top Layer w0.8: v1(64.325,46.575) 67.15,46.575 68.259,45.466 U48.25
  Bottom Layer w0.3: C54.1 59.476,67.975 D28.5 62.123,64.261 J4.3 ; C54.1@58.096,69.192 cw(c58.096,68.799) C54.1@58.374,69.077 ; C54.1@58.352,69.449 ccw(c59.197,69.449) 58.599,68.851 ; J4.3@61.933,65.601 ccw(c61.473,66.061) 62.123,66.061 ; 62.123,66.337 ccw(c63.163,66.337) J4.3@62.427,65.601
  Bottom Layer w0.8: J4.3 62.18,48.72 v1(64.325,46.575)
VCC+3.8V: C37.1 C39.1 C41.1 C45.1 C46.1 D55.2 L6.2 P32.4 R170.2 R178.1 R181.1 R188.1 R194.1 R197.1 R204.1 U48.1 U48.2 Z4.1 Z4.2 | length 130.5
  Top Layer w0.8: C41.1 44.234,70.075 47.848,70.075 U48.1 52.831,67.056 ; 49.629,68.294 cw(c48.392,67.056) U48.1@50.142,67.056 ; U48.2 52.711,65.786 ; P32.4 88.794,47.244 ; P32.4@87.623,46.997 cw(c88.221,46.399) 88.221,47.244 cw(c88.221,48.089) P32.4@87.623,47.491
  Top Layer w0.9: C37.1@36.586,68.891 cw(c37.531,69.452) 36.754,70.229 ; C37.1@36.655,69.439 ccw(c35.887,70.207) 36.973,70.207 ccw(c38.059,70.207) 37.291,69.439 ccw(c38.059,70.207) 38.059,69.121 ccw(c38.059,68.035) C37.1@37.291,68.803 ; C37.1@37.36,69.351 cw(c38.558,70.062) 37.573,71.048 ; R194.1@37.573,82.096 R188.1 R197.1 R181.1 37.573,74.129 37.573,72.097 37.573,71.048 ; C39.1@40.211,68.803 ccw(c39.443,68.035) 39.443,69.121 ccw(c39.443,70.207) C39.1@40.211,69.439 ; C39.1@40.847,68.803 cw(c41.615,68.035) 41.615,69.121 cw(c41.615,70.207) C39.1@40.847,69.439 ; C41.1@42.966,69.121 C39.1 C37.1 36.973,70.448 37.573,71.048 ; 48.986,65.786 U48.2 U48.1
  Top Layer w1.5: C39.1 42.533,71.125 48.077,71.125 77.075,71.125 80.264,67.936 C45.1 R170.2@80.264,52.244 ; R170.2@80.185,52.165 Z4.1 Z4.2 84.481,51.946 84.481,49.656 L6.2 ; 80.264,58.59 cw(c81.592,58.59) C46.1@80.653,59.528 ; 80.264,60.168 ccw(c81.592,60.168) C46.1@80.653,59.23 ; 83.185,52.165 cw(c83.185,49.66) v4@84.956,51.431 ; L6.2@84.251,49.656 ccw(c84.251,50.724) L6.2@85.006,49.969 ; 84.481,50.676 cw(c85.549,50.676) v4@84.794,51.431 ; 84.481,50.844 ccw(c85.719,50.844) L6.2@84.844,49.969
  Bottom Layer w1.5: v4@84.843,51.341 84.836,51.364 D55.2 85.016,47.244 P32.4
  other v4: 84.925,50.05 84.875,51.35
VSIM: C52.1 D28.4 J4.1 J4.4 U48.22 | length 49.5
  Top Layer w0.8: v1(57.9,64.175) 61.05,61.025 v1(63.45,61.025) ; v1(66.625,43.4) 68.369,41.656 U48.22
  Bottom Layer w0.3: J4.4@63.203,65.601 ccw(c62.605,66.199) 63.45,66.199 ccw(c64.295,66.199) J4.4@63.697,65.601 ; J4.4 63.45,66.825 63.123,67.152 D28.4 64.325,67.975 65.475,69.125 ; C52.1@65.299,69.533 cw(c64.913,69.125) 65.475,69.125 ; C52.1 65.475,69.125 ; C52.1@65.651,69.533 ccw(c66.037,69.125) 65.475,69.125
  Bottom Layer w0.8: v1(57.9,64.175) 57.929,64.204 J4.1 ; J4.4 v1(63.45,61.025) 63.45,49.95 66.625,46.775 v1(66.625,43.4)
WORK: P31.9 R203.1 U48.14 | length 62
  Top Layer w0.3: P31.9@46.436,47.244 cw(c47.624,47.244) 46.784,48.084 ; P31.9@47.036,47.244 cw(c49.672,47.244) 47.808,49.108 ; 47.296,48.596 ccw(c48.648,47.244) P31.9 46.736,48.036 49.246,50.546 U48.14 ; P31.9@47.336,47.244 cw(c50.697,47.244) 48.32,49.62 ; U48.14@49.965,50.369 ccw(c49.538,49.942) 49.538,50.546 ccw(c49.538,51.15) U48.14@49.965,50.723
  Top Layer w0.8: U48.14 52.596,50.546
  Bottom Layer w0.3: 44.209,48.891 ccw(c46.736,51.417) P31.9@46.736,47.844 ; 44.722,48.378 ccw(c46.736,50.393) P31.9@46.736,47.544 ; 45.234,47.866 ccw(c46.736,49.369) P31.9 45.856,47.244 ; 45.746,47.354 ccw(c46.736,48.344) P31.9@46.736,46.944 ; P31.9@46.177,47.025 ccw(c45.856,46.899) 45.856,47.244 ; P31.9@46.177,47.463 cw(c45.856,47.589) 45.856,47.244 ; R203.1@47.877,77.776 ccw(c47.44,77.338) 47.44,77.957 ccw(c47.44,78.576) R203.1@47.877,78.138 ; R203.1 45.107,77.957 42.975,75.825 42.975,50.125 45.856,47.244
pads on no net: Designator10.0 Designator10.2 Designator10.3 Designator10.4 Designator10.5 Designator10.6 Designator10.7 Designator10.8 Designator10.9 J4.7 J4.8 P31.4 P31.5 P31.8 P32.5 P32.8 P32.9 P32.10 P32.11 U48.6 U48.7 U48.8 U48.16 U48.18 U48.19 U48.20 U48.21 U48.26 U48.27 U48.28 U48.29 U48.30 U48.31 U48.32 U48.33 U48.34 U48.41
copper on no net: | length 86.4
  Top Layer w0.8: 44.456,59.944 46.736,59.944 ; 45.241,49.784 46.736,49.784 ; 45.629,57.404 46.736,57.404 ; 46.489,49.537 ccw(c45.891,48.939) 45.891,49.784 ccw(c45.891,50.629) 46.489,50.031 ; 46.489,57.157 ccw(c45.891,56.559) 45.891,57.404 ccw(c45.891,58.249) 46.489,57.651 ; 46.489,59.697 ccw(c45.891,59.099) 45.891,59.944 ccw(c45.891,60.789) 46.489,60.191 ; 48.956,41.656 50.867,41.656 55.269,41.656 ; 49.031,60.706 50.867,60.706 53.119,60.706 ; 49.299,42.926 50.867,42.926 54.574,42.926 ; 49.311,59.436 50.867,59.436 53.136,59.436 ; 49.519,48.006 50.867,48.006 53.544,48.006 ; 49.659,58.166 50.867,58.166 53.159,58.166 ; 50.867,44.196 54.534,44.196 ; 50.867,45.466 53.691,45.466 ; 72.911,46.736 75.117,46.736 77.139,46.736 ; 73.006,48.006 75.117,48.006 76.769,48.006 ; 73.051,49.276 75.117,49.276 76.549,49.276 ; 73.064,65.786 75.117,65.786 77.314,65.786 ; 73.096,50.546 75.117,50.546 76.529,50.546 ; 73.741,51.816 75.117,51.816 76.866,51.816 ; 73.969,54.356 75.117,54.356 75.969,54.356 ; 75.117,53.086 76.839,53.086 ; 75.117,55.626 76.649,55.626 ; 75.117,56.896 77.646,56.896 ; 87.376,49.784 88.766,49.784 ; 87.376,57.404 88.929,57.404 ; 87.376,59.944 88.919,59.944 ; 87.376,62.484 88.809,62.484 ; 87.376,65.024 88.774,65.024 ; 87.623,49.537 cw(c88.221,48.939) 88.221,49.784 cw(c88.221,50.629) 87.623,50.031 ; 87.623,57.157 cw(c88.221,56.559) 88.221,57.404 cw(c88.221,58.249) 87.623,57.651 ; 87.623,59.697 cw(c88.221,59.099) 88.221,59.944 cw(c88.221,60.789) 87.623,60.191 ; 87.623,62.237 cw(c88.221,61.639) 88.221,62.484 cw(c88.221,63.329) 87.623,62.731 ; 87.623,64.777 cw(c88.221,64.179) 88.221,65.024 cw(c88.221,65.869) 87.623,65.271
  other v5: 55.88,57.404 69.88,57.404

## Polygon pours and split planes (outlines as drawn)
GND on Top Layer "Top Layer-No Net" (hatched 90Degree grid 0 track 0.203, pour order 1000): 35.125,83.875 35.125,35.125 89.875,35.125 89.875,83.875
VCC+3.8V on Top Layer "Top Layer-No Net" (hatched 90Degree grid 0 track 0.203, pour order 1001): 39.625,70.8 39.575,70.75 39.575,68.225 44.125,68.225 44.175,68.175 44.15,68.2 44.15,70.8 39.625,70.8
VCC+3.8V on Top Layer "Top Layer-No Net" (hatched 90Degree grid 0 track 0.203, pour order 1000): 48.077,71.125 48.075,71.123 48.075,65.45 54.35,65.45 54.375,65.475 54.25,65.6 54.25,71.125 48.077,71.125
GND on Bottom Layer "Top Layer-No Net" (hatched 90Degree grid 0 track 0.203, pour order 1001): 35.125,83.875 35.125,35.125 89.875,35.125 89.875,83.875

## Keep-outs
Keep-Out Layer:
  lines w0.254: 32.492,36.524 33,35 ; 32.492,82.476 33,84 ; 32.746,35 33.254,35 ; 32.746,84 33.254,84 ; 33,54.396 33,35 ; 33,64.604 33,84 ; 33.508,36.524 33,35 ; 33.508,82.476 33,84 ; 35,85.746 35,86.254 ; 36.524,85.492 35,86 ; 36.524,86.508 35,86 ; 57.396,86 35,86 ; 67.604,86 90,86 ; 88.476,85.492 90,86 ; 88.476,86.508 90,86 ; 90,85.746 90,86.254 ; 92.492,36.524 93,35 ; 92.492,78.476 93,80 ; 92.746,35 93.254,35 ; 92.746,80 93.254,80 ; 93,52.396 93,35 ; 93,62.604 93,80 ; 93.508,36.524 93,35 ; 93.508,78.476 93,80 ; 35,37 ccw(c37,37) 37,35 88,35 ccw(c88,37) 90,37 90,82 ccw(c88,82) 88,84 37,84 ccw(c37,82) 35,82 35,37
  text "55 (mm)" at 57.65,85.086 h1.52
  text "49 (mm)" at 33.914,54.65 h1.52 r90
  text "45 (mm)" at 93.914,52.65 h1.52 r90

## Silkscreen, mask and mechanical layers (free items; w line width, h text height)
Top Overlay:
  text "LINKA" at 69.025,76 h1
  text "LINKB" at 75.25,76 h1
  text "WORK" at 51.125,75.95 h1
  text "GPRS" at 56.925,75.95 h1
  text "DATA" at 63.325,75.95 h1
  text "+3.8V" at 44.975,75.875 h1
  text "RUYI GPRS V3.0" at 49.925,72.975 h1.52

## Text inside footprints (layer, text, board x,y; h text height)
J4: Bottom Overlay "MUP" at 66.142,44.298 h1.52; Bottom Overlay "SIM CARD" at 67.513,50.952 h1.52
U48: Top Overlay "ATT" at 68.896,66.04 h1